# EAGLE board main (EAGLE 9.6.2)
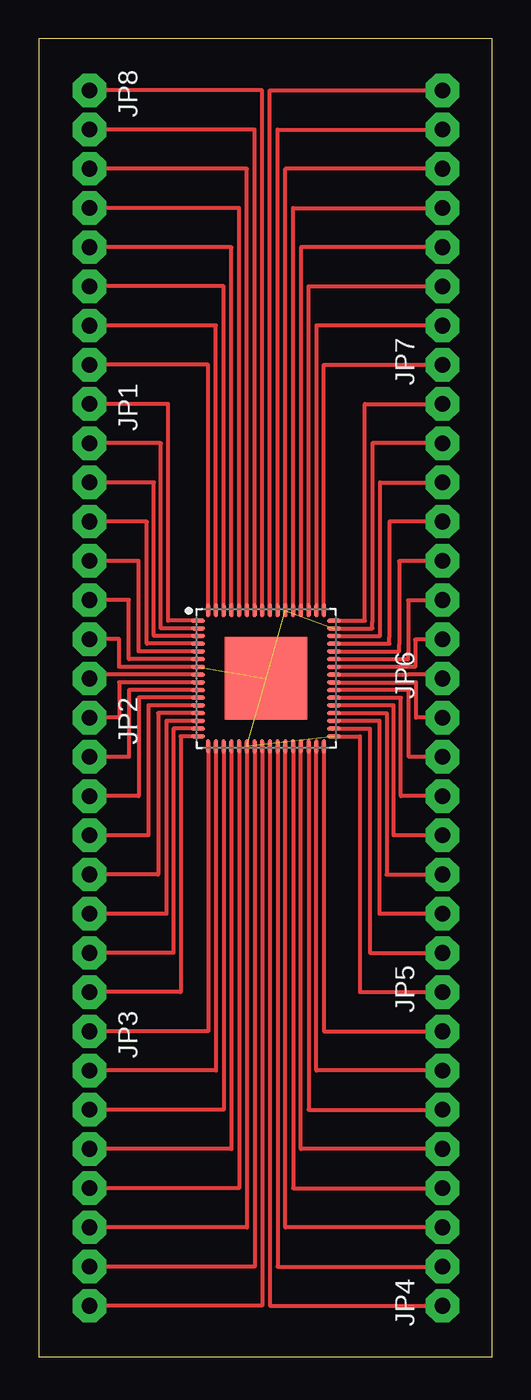
[diagram p0: board, top side]
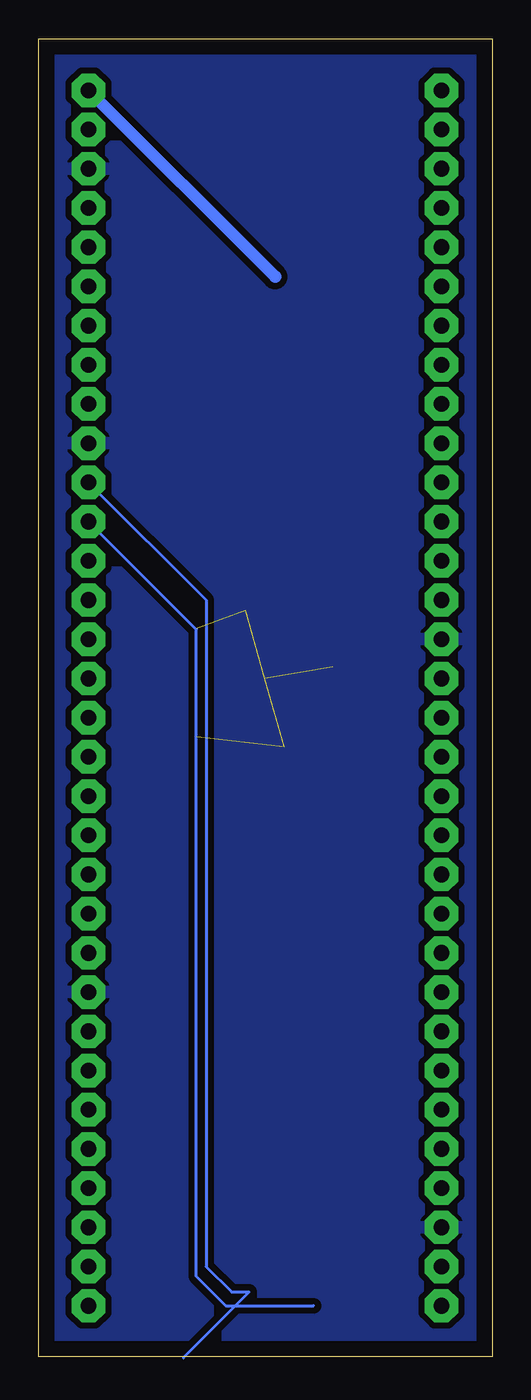
[diagram p1: board, bottom side, seen from below]

Size 29.39 x 85.39 mm. Coordinates in mm from the lower left corner, seen from the top.
Outline: 0,0 29.39,0 29.39,85.39 0,85.39 0,0
Copper layers (1*16): Top 0.035mm / dielectric 1.5mm / Bottom 0.035mm
Design rules "default *": minimum track width 6mil, minimum drill 0.35mm, track to track 8mil, track to pad 8mil, pad to pad 8mil, via to via 8mil, smd to smd 8mil, copper to edge 40mil, drill to drill 6mil, minimum pad ring 10mil, minimum via ring 8mil, stop-mask expansion 4mil, vias tented up to drill 0mil, thermal gap 10mil

## Footprints (pad centres in the part's own frame; a part is rotated, then mirrored left to right if it is on the bottom)
1X08-CLEANBIG = drill 1.016 pad 2.159 octagon: 1 -8.89,0; 2 -6.35,0; 3 -3.81,0; 4 -1.27,0; 5 1.27,0; 6 3.81,0; 7 6.35,0; 8 8.89,0
QFN50P900X900X100-65T535 = smd 0.911 x 0.264: 1 -4.401,3.75; 2 -4.401,3.25; 3 -4.401,2.75; 4 -4.401,2.25; 5 -4.401,1.75; 6 -4.401,1.25; 7 -4.401,0.75; 8 -4.401,0.25; 9 -4.401,-0.25; 10 -4.401,-0.75; 11 -4.401,-1.25; 12 -4.401,-1.75; 13 -4.401,-2.25; 14 -4.401,-2.75; 15 -4.401,-3.25; 16 -4.401,-3.75; 33 4.401,-3.75; 34 4.401,-3.25; 35 4.401,-2.75; 36 4.401,-2.25; 37 4.401,-1.75; 38 4.401,-1.25; 39 4.401,-0.75; 40 4.401,-0.25; 41 4.401,0.25; 42 4.401,0.75; 43 4.401,1.25; 44 4.401,1.75; 45 4.401,2.25; 46 4.401,2.75; 47 4.401,3.25; 48 4.401,3.75 | smd 0.264 x 0.911: 17 -3.75,-4.401; 18 -3.25,-4.401; 19 -2.75,-4.401; 20 -2.25,-4.401; 21 -1.75,-4.401; 22 -1.25,-4.401; 23 -0.75,-4.401; 24 -0.25,-4.401; 25 0.25,-4.401; 26 0.75,-4.401; 27 1.25,-4.401; 28 1.75,-4.401; 29 2.25,-4.401; 30 2.75,-4.401; 31 3.25,-4.401; 32 3.75,-4.401; 49 3.75,4.401; 50 3.25,4.401; 51 2.75,4.401; 52 2.25,4.401; 53 1.75,4.401; 54 1.25,4.401; 55 0.75,4.401; 56 0.25,4.401; 57 -0.25,4.401; 58 -0.75,4.401; 59 -1.25,4.401; 60 -1.75,4.401; 61 -2.25,4.401; 62 -2.75,4.401; 63 -3.25,4.401; 64 -3.75,4.401 | smd 5.35 x 5.35: 65 0,0

## Placement (x,y rotation side)
JP1  [1X08-CLEANBIG]  3.3,52.83 270 top
JP2  [1X08-CLEANBIG]  3.3,32.51 270 top
JP3  [1X08-CLEANBIG]  3.3,12.19 270 top
JP4  [1X08-CLEANBIG]  26.16,12.19 90 top
JP5  [1X08-CLEANBIG]  26.16,32.51 90 top
JP6  [1X08-CLEANBIG]  26.16,52.83 90 top
JP7  [1X08-CLEANBIG]  26.16,73.15 90 top
JP8  [1X08-CLEANBIG]  3.3,73.15 270 top
U$1  [QFN50P900X900X100-65T535]  14.73,43.94 0 top

## Library data of the parts
JP1-JP8 = larger_pad_header
U$1 = atsamd21j18a

## Nets
GND: JP1.7 JP3.6 JP5.1 JP6.7 JP7.6 U$1.7 U$1.22 U$1.33 U$1.47 U$1.54 U$1.65
P1: JP1.1 U$1.1
P2: JP1.2 U$1.2
P3: JP1.3 U$1.3
P4: JP1.4 U$1.4
P5: JP1.5 U$1.5
P6: JP1.6 U$1.6
P8: JP1.8 U$1.8
P9: JP2.1 U$1.9
P10: JP2.2 U$1.10
P11: JP2.3 U$1.11
P12: JP2.4 U$1.12
P13: JP2.5 U$1.13
P14: JP2.6 U$1.14
P15: JP2.7 U$1.15
P16: JP2.8 U$1.16
P17: JP3.1 U$1.17
P18: JP3.2 U$1.18
P19: JP3.3 U$1.19
P20: JP3.4 U$1.20
P21: JP3.5 U$1.21
P23: JP3.7 U$1.23
P24: JP3.8 U$1.24
P25: JP4.1 U$1.25
P26: JP4.2 U$1.26
P27: JP4.3 U$1.27
P28: JP4.4 U$1.28
P29: JP4.5 U$1.29
P30: JP4.6 U$1.30
P31: JP4.7 U$1.31
P32: JP4.8 U$1.32
P34: JP5.2 U$1.34
P35: JP5.3 U$1.35
P36: JP5.4 U$1.36
P37: JP5.5 U$1.37
P38: JP5.6 U$1.38
P39: JP5.7 U$1.39
P40: JP5.8 U$1.40
P41: JP6.1 U$1.41
P42: JP6.2 U$1.42
P43: JP6.3 U$1.43
P44: JP6.4 U$1.44
P45: JP6.5 U$1.45
P46: JP6.6 U$1.46
P48: JP6.8 U$1.48
P49: JP7.1 U$1.49
P50: JP7.2 U$1.50
P51: JP7.3 U$1.51
P52: JP7.4 U$1.52
P53: JP7.5 U$1.53
P55: JP7.7 U$1.55
P56: JP7.8 U$1.56
P57: JP8.1 U$1.57
P58: JP8.2 U$1.58
P59: JP8.3 U$1.59
P60: JP8.4 U$1.60
P61: JP8.5 U$1.61
P62: JP8.6 U$1.62
P63: JP8.7 U$1.63
P64: JP8.8 U$1.64

## Tracks (layer width: path | path; a pad name or v marks a point on that pad's centre or on a via)
GND  (5 unrouted)
  Top 0.254: U$1.7 5.21,44.69 5.21,46.48 JP1.7 | U$1.22 13.48,8.38 JP3.6 | U$1.33 20.81,40.19 20.81,23.62 JP5.1 | JP7.6 15.98,76.96 U$1.54 | JP6.7 21.62,59.18 21.62,47.63 21.62,47.19 U$1.47
  pour Bottom (isolate 0.406): 0.13,85.22 29.34,85.22 29.34,0.13 0.13,0.13
P1
  Top 0.254: U$1.1 8.38,47.69 8.38,61.72 JP1.1
P2
  Top 0.254: U$1.2 7.92,47.19 7.92,59.18 JP1.2
P3
  Top 0.254: U$1.3 7.47,46.69 7.47,56.64 JP1.3
P4
  Top 0.254: U$1.4 7.01,46.19 7.01,54.1 JP1.4
P5
  Top 0.254: U$1.5 6.48,45.69 6.48,51.56 JP1.5
P6
  Top 0.254: U$1.6 5.84,45.19 5.84,49.02 JP1.6
P8
  Top 0.254: U$1.8 3.3,44.19 JP1.8
P9
  Top 0.254: U$1.9 5.21,43.69 5.21,41.4 JP2.1
P10
  Top 0.254: U$1.10 5.84,43.19 5.84,38.86 JP2.2
P11
  Top 0.254: U$1.11 6.48,42.69 6.48,36.32 JP2.3
P12
  Top 0.254: U$1.12 7.11,42.19 7.11,33.78 JP2.4
P13
  Top 0.254: U$1.13 7.75,41.69 7.75,31.24 JP2.5
P14
  Top 0.254: U$1.14 8.28,41.19 8.28,28.7 JP2.6
P15
  Top 0.254: U$1.15 8.73,40.69 8.73,26.16 JP2.7
P16
  Top 0.254: U$1.16 9.19,40.19 9.19,23.62 JP2.8
P17
  Top 0.254: U$1.17 10.98,21.08 JP3.1
P18
  Top 0.254: U$1.18 11.48,18.54 JP3.2
P19
  Top 0.254: U$1.19 11.98,16 JP3.3
P20
  Top 0.254: U$1.20 12.48,13.46 JP3.4
P21
  Top 0.254: U$1.21 12.98,10.92 JP3.5
P23
  Top 0.254: U$1.23 13.98,5.84 JP3.7
P24
  Top 0.254: U$1.24 14.48,3.3 JP3.8
P25
  Top 0.254: U$1.25 14.98,3.3 JP4.1
P26
  Top 0.254: U$1.26 15.48,5.84 JP4.2
P27
  Top 0.254: JP4.3 15.98,8.38 U$1.27
P28
  Top 0.254: U$1.28 16.48,10.92 JP4.4
P29
  Top 0.254: JP4.5 16.98,13.46 U$1.29
P30
  Top 0.254: U$1.30 17.48,16 JP4.6
P31
  Top 0.254: JP4.7 17.98,18.54 U$1.31
P32
  Top 0.254: U$1.32 18.48,21.08 JP4.8
P34
  Top 0.254: U$1.34 21.45,40.69 21.45,26.16 JP5.2
P35
  Top 0.254: JP5.3 22.08,28.7 22.08,41.19 U$1.35
P36
  Top 0.254: U$1.36 22.54,41.69 22.54,31.24 JP5.4
P37
  Top 0.254: JP5.5 23,33.78 23,42.19 U$1.37
P38
  Top 0.254: JP5.6 23.45,36.32 23.45,42.69 U$1.38
P39
  Top 0.254: JP5.7 23.99,38.86 23.99,43.19 U$1.39
P40
  Top 0.254: JP5.8 24.44,41.4 24.44,43.69 U$1.40
P41
  Top 0.254: U$1.41 23.9,44.19 26.16,44.19 JP6.1
P42
  Top 0.254: U$1.42 24.38,44.69 24.38,46.46 26.14,46.46 JP6.2
P43
  Top 0.254: JP6.3 26.14,49 23.93,49 23.93,45.63 23.93,45.19 U$1.43
P44
  Top 0.254: JP6.4 26.14,51.54 23.36,51.54 23.36,46.13 23.36,45.69 U$1.44
P45
  Top 0.254: JP6.5 22.72,54.1 22.72,46.63 22.72,46.19 U$1.45
  Bottom 0.203: 11.58,3.3 17.27,3.3 19.18,5.21 19.18,47.12 JP6.5
P46
  Top 0.254: JP6.6 22.12,56.64 22.12,47.13 22.12,46.69 U$1.46
  Bottom 0.203: JP6.6 18.54,49.02 18.54,5.84 16.89,4.19 15.75,4.19 20.01,-0.07
P48
  Top 0.254: JP6.8 21.12,61.72 21.12,47.69 U$1.48
P49
  Top 0.254: U$1.49 18.48,64.26 JP7.1
P50
  Top 0.254: JP7.2 17.98,66.8 U$1.50
P51
  Top 0.254: U$1.51 17.48,69.34 JP7.3
P52
  Top 0.254: JP7.4 16.98,71.88 U$1.52
P53
  Top 0.254: U$1.53 16.48,74.42 JP7.5
P55
  Top 0.254: U$1.55 15.48,79.5 JP7.7
P56
  Top 0.254: U$1.56 14.98,82.04 JP7.8
  Bottom 0.813: 14.08,69.96 JP7.8
P57
  Top 0.254: U$1.57 14.48,82.04 JP8.1
P58
  Top 0.254: U$1.58 13.98,79.5 JP8.2
P59
  Top 0.254: U$1.59 13.48,76.96 JP8.3
P60
  Top 0.254: U$1.60 12.98,74.42 JP8.4
P61
  Top 0.254: U$1.61 12.48,71.88 JP8.5
P62
  Top 0.254: U$1.62 11.98,69.34 JP8.6
P63
  Top 0.254: U$1.63 11.48,66.8 JP8.7
P64
  Top 0.254: U$1.64 10.98,64.26 JP8.8